# Altium PCB RS-119-8912.PcbDoc (part 2 of 2)
Units mm, origin at the board's own origin, x right, y up, seen from the top; angles counter-clockwise.
Board outline 125 x 120.8 mm, 2 copper layers (Top Layer, Bottom Layer); 161 components, 141 nets, 539 pads, 141 vias.
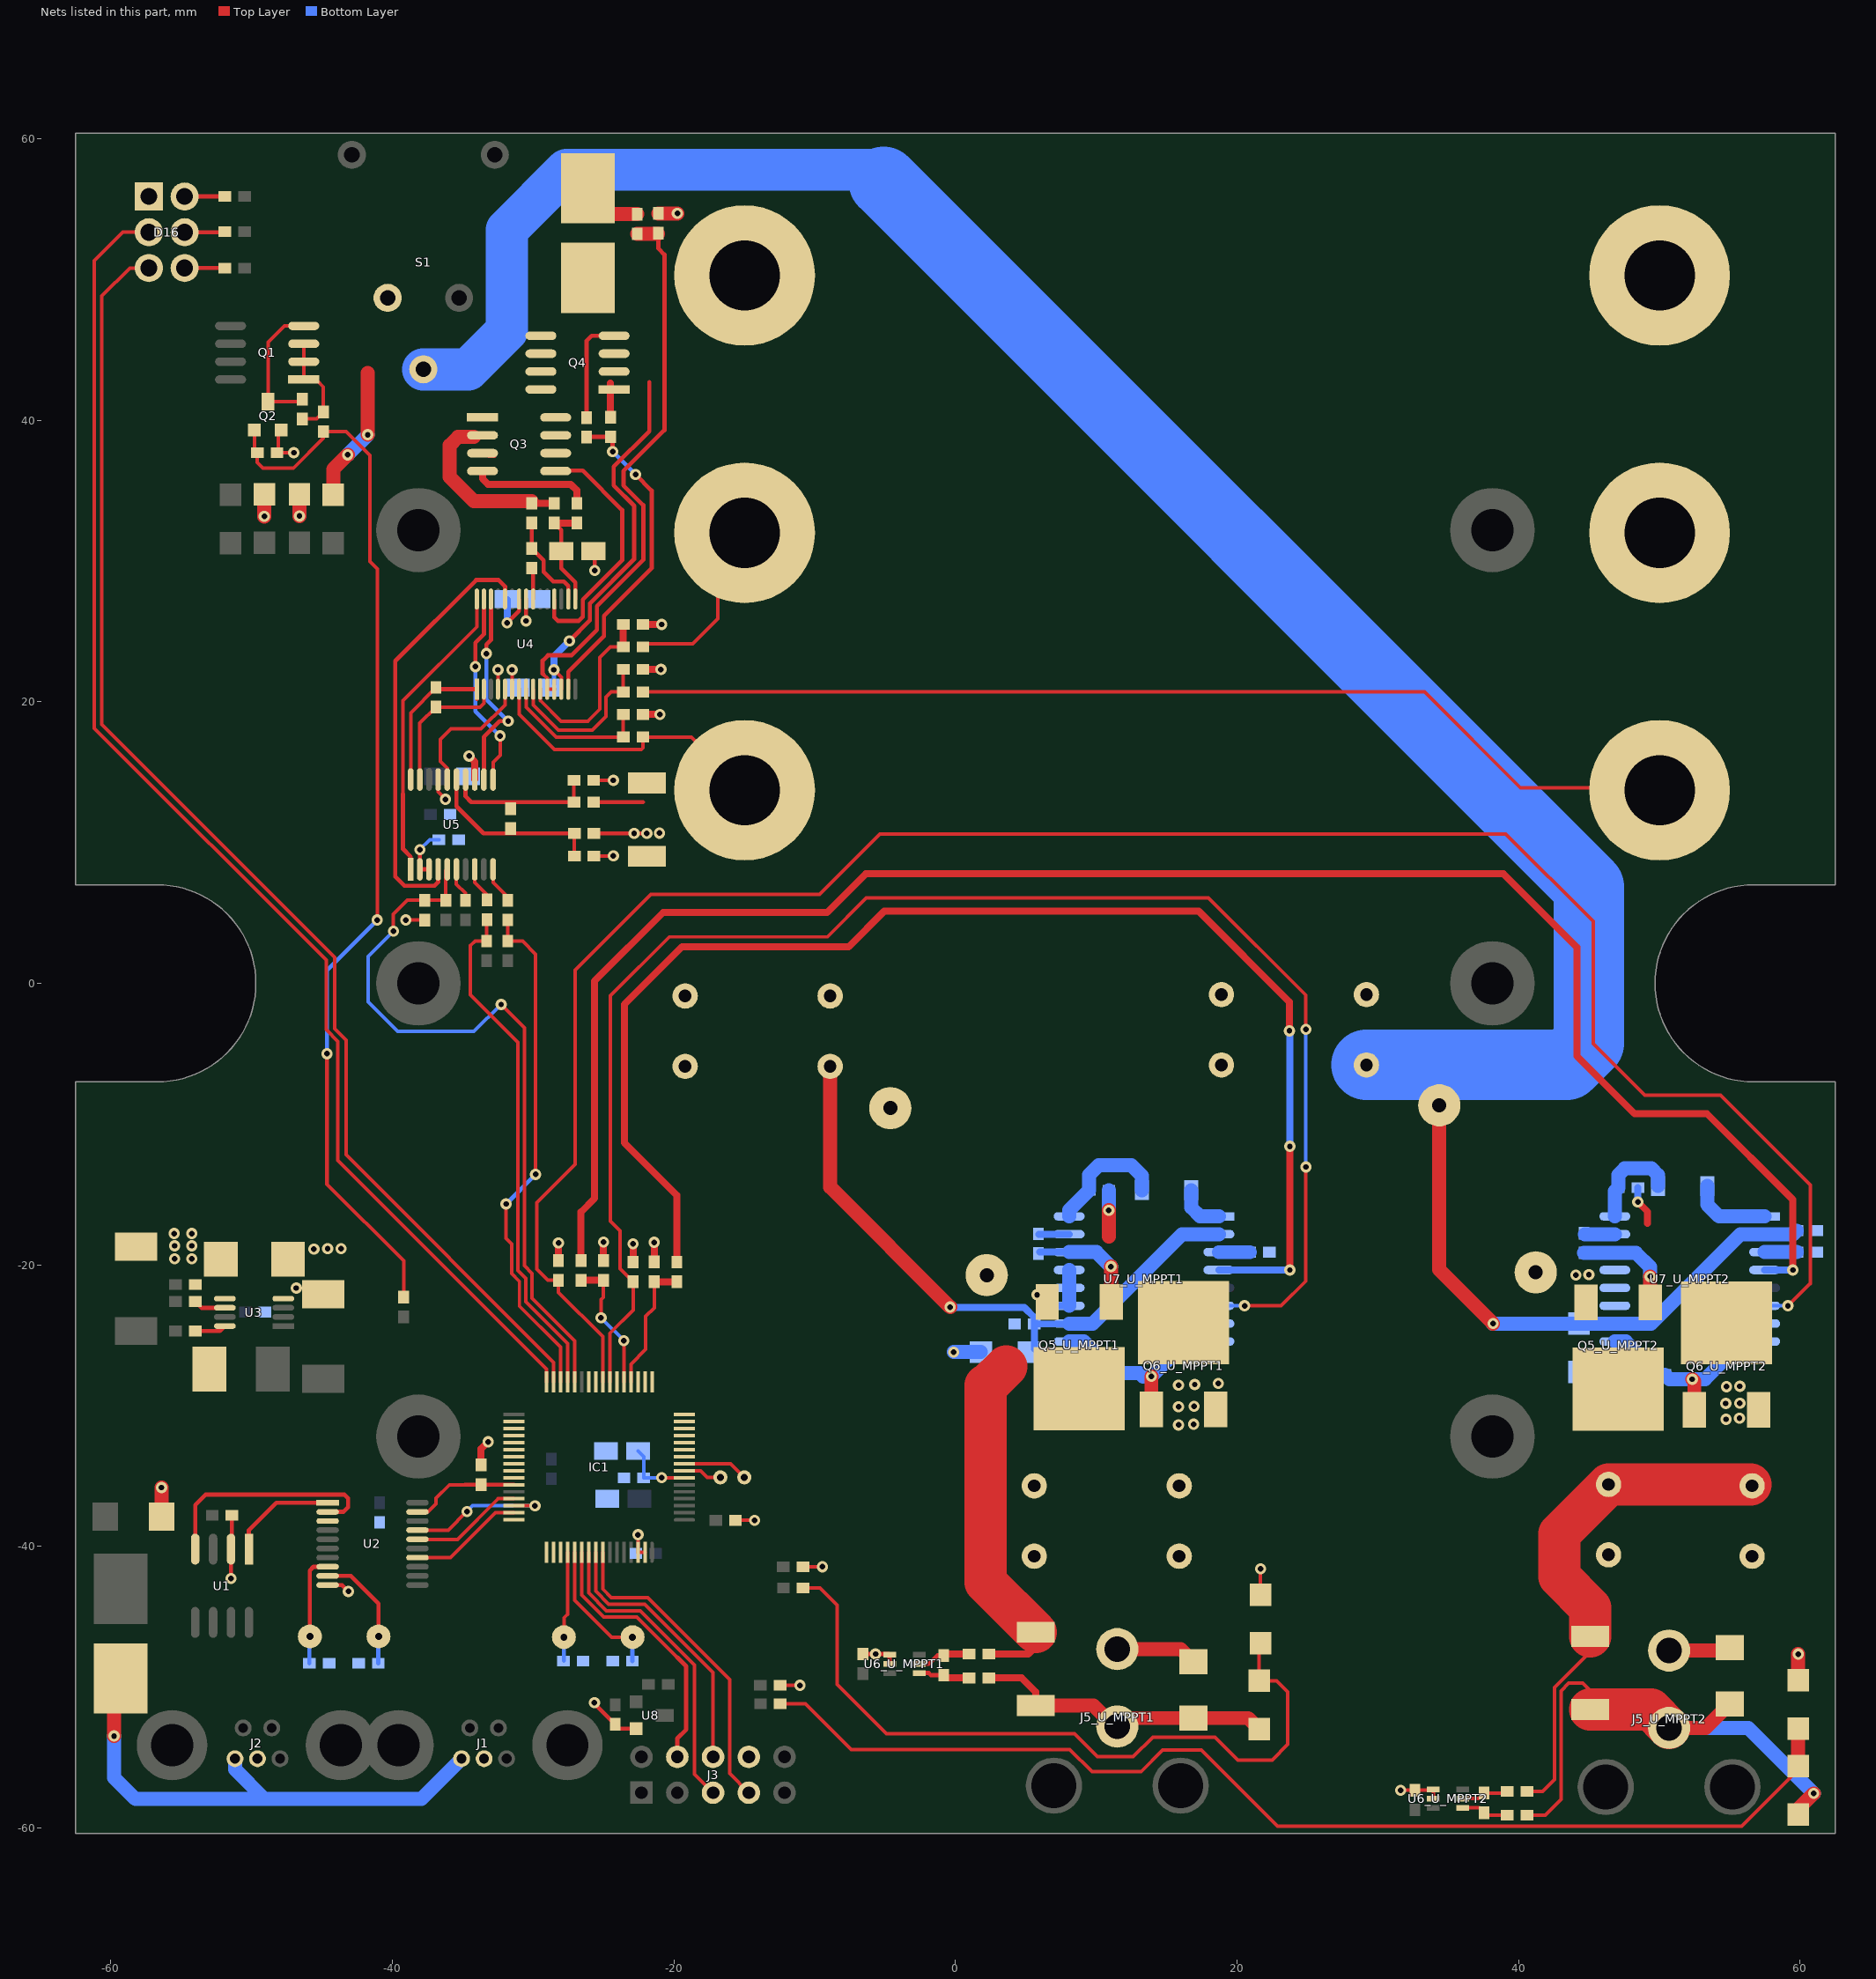
[diagram p2: the nets of this part, all layers, seen from the top]

## Via types
v1: diameter 0.8, hole 0.4, Top Layer to Bottom Layer, 141 vias

## Nets (pads, with @x,y where several pads share a name; then routed paths per layer and width w, separated by ;. In a path a pad name is that pad's centre, name@x,y a point inside that pad or via, vN(x,y) a via of type N, cw(c..) or ccw(c..) an arc to the next point about the centre after c; other vN are vias at no path point) (continued)
CANGND: C1.1 C2.2 C3.1 C4.1 C5.2 C6.2 C8.2 C9.2 C11.2 C12.2 C13.2 C14.2 C15.2 C16.2 C17.2 C18.2 C19.2 C20.2 C21.2 C22.2 C23.2 C24.2 C25.2 C26.2 C28.2 C30.2 C32_U_MPPT1.1 C32_U_MPPT2.1 C34_U_MPPT1.1 C34_U_MPPT2.1 C35_U_MPPT1.2 C35_U_MPPT2.2 C36_U_MPPT1.2 C36_U_MPPT2.2 C37_U_MPPT1.2 C37_U_MPPT2.2 C38_U_MPPT1.2 C38_U_MPPT2.2 C39_U_MPPT1.2 C39_U_MPPT2.2 C40_U_MPPT1.2 C40_U_MPPT2.2 C41_U_MPPT1.2 C41_U_MPPT2.2 D1.A D2.A D4_U_MPPT1.A D4_U_MPPT2.A D16.1 IC1.62 IC1.63 J1.3 J2.3 J3.8 J5_U_MPPT1.2 J5_U_MPPT2.2 Q2.2 Q6_U_MPPT1.3 Q6_U_MPPT2.3 R10.2 R11.1 R14.2 R15.2 R21.1 R34.1 R36.2 R37.2 R44_U_MPPT1.1 R44_U_MPPT2.1 R47_U_MPPT1.2 R47_U_MPPT2.2 R48_U_MPPT1.2 R48_U_MPPT2.2 U1.2 U2.10 U3.4 U4.4 U4.6 U4.23 U5.13 U5.17 U6_U_MPPT1.1 U6_U_MPPT1.2 U6_U_MPPT2.1 U6_U_MPPT2.2 U7_U_MPPT1.7 U7_U_MPPT2.7 U8.2 | length 73.4
  Top Layer w0.25: R11.1@-48.2,37.7 v1(-47,37.7) ; R11.1@-48.1,37.925 Q2.2@-48.1,39.095 ; v1(-39.05,4.5) R34.1@-37.7,4.5 ; U5.17@-36.75,14.48 -36.75,13.596 v1(-36.225,13.071) ; U4.4@-32.5,20.9 v1(-32.5,22.275) ; U4.6@-31.5,20.9 v1(-31.5,22.275) ; C28.2@-25.703,14.425 v1@-24.475,14.425 ; C30.2@-25.678,9.05 v1(-24.3,9.05) ; v1(-22.55,-39.175) IC1.62@-22.558,-40.42 IC1.63@-22.058,-40.42 ; C12.2@-15.628,-38.15 v1(-14.275,-38.15) ; C39_U_MPPT2.2@-12.453,-49.875 v1(-11.05,-49.875) ; C39_U_MPPT1.2@-10.828,-41.45 v1(-9.45,-41.45) ; R48_U_MPPT1.2@21.675,-43.446 v1(21.675,-41.6) ; v1(31.625,-57.325) U6_U_MPPT2.1@33.9,-57.325 ; U6_U_MPPT2.2@33.95,-57.925 U6_U_MPPT2.1@33.95,-57.275
  Top Layer w0.3: v1(-51.465,-42.285) U1.2@-51.465,-40.2 ; U1.2@-51.4,-40.135 C1.1@-51.4,-37.8 ; U2.10@-44.6,-42.75 -43.575,-42.75 v1(-43.125,-43.2) ; v1(-30.5,25.75) U4.23@-30.5,27.3 ; R37.2@-25.678,10.65 v1(-21.925,10.65) ; v1(-25.647,-51.103) -25.647,-51.175 -23.867,-52.955 U8.2@-22.675,-52.955 ; v1(-25.625,29.325) C18.2@-25.625,30.5 ; C32_U_MPPT1.1@-6.575,-47.65 U6_U_MPPT1.1@-4.725,-47.65 ; U6_U_MPPT1.2@-4.675,-48.35 U6_U_MPPT1.1@-4.675,-47.7
  Top Layer w0.5: v1(-34.55,16.15) -34.15,15.75 U5.13@-34.15,14.48 ; R10.2@-33.7,-34.223 -33.7,-33.075 v1(-33.2,-32.575) ; R47_U_MPPT2.2@-28.2,-19.703 v1(-28.2,-18.45) ; R44_U_MPPT2.1@-25,-19.7 v1(-25,-18.375) ; R47_U_MPPT1.2@-22.9,-19.803 v1(-22.9,-18.5) ; C26.2@-22.203,19.1 v1(-21,19.1) ; C25.2@-22.203,22.3 v1(-20.925,22.3) ; C24.2@-22.203,25.5 v1(-20.875,25.5) ; R44_U_MPPT1.1@-21.4,-19.8 v1(-21.4,-18.4)
  Top Layer w1: D1.A@-56.4,-37.9 v1(-56.4,-35.825) ; v1(-49.1,33.175) R14.2@-49.1,34.729 ; v1(-46.6,33.2) R15.2@-46.6,34.729 ; C23.2@-21.1,54.697 v1(-19.753,54.697) ; J5_U_MPPT1.2@11.5,-47.3 16,-47.3 D4_U_MPPT1.A@16.9,-48.2 ; J5_U_MPPT2.2@50.7,-47.4 D4_U_MPPT2.A@55.1,-47.4 ; R48_U_MPPT2.2@59.873,-49.521 v1(59.873,-47.652)
  Bottom Layer w1: v1(-0.125,-26.2) C34_U_MPPT1.1@1.8,-26.2
  other v1: -5.675,-47.65 15.85,-31.375 16.925,-31.325 54.75,-30.975 55.7,-30.9 15.85,-30.075 16.95,-30.05 54.725,-29.85 55.725,-29.825 54.775,-28.65 55.725,-28.625 15.85,-28.55 17,-28.5 18.675,-28.425 -46.825,-21.65 -55.475,-19.575 -54.25,-19.575 -45.575,-18.875 -44.6,-18.85 -43.65,-18.85 -55.475,-18.65 -54.25,-18.65 -55.5,-17.775 -54.25,-17.775 -22.825,10.65 -21.025,10.675 -24.3,14.425
EREF+: IC1.10
EREF-: IC1.11
LEDRED: D16.3 IC1.31 | length 94.6
  Top Layer w0.25: D16.3@-57.3,50.82 -58.655,50.82 -60.65,48.825 -60.65,18.4 -44.1,1.85 -44.1,-3.225 -43.3,-4.025 -43.3,-12.183 -28.558,-26.925 IC1.31@-28.558,-28.32
LEDYLW: D16.2 IC1.32 | length 97.7
  Top Layer w0.25: D16.2@-57.3,53.36 -59.14,53.36 -61.175,51.325 -61.175,18.125 -44.7,1.65 -44.7,-3.297 -43.875,-4.122 -43.875,-12.575 -29.058,-27.392 IC1.32@-29.058,-28.32
NetB1_1: B1.1 F2.1 R23.2 | length 2.8
  Top Layer w1: F2.1@-25.422,54.647 R23.2@-22.6,54.647
NetB1_2: B1.2 B2.1 R25.2 | length 7.9
  Top Layer w0.25: R25.2@-22.2,24.125 -18.65,24.125 -16.875,25.9 B2.1@-16.875,27.7
NetB2_2: B2.2 B3.1 R27.2 | length 75.2
  Top Layer w0.25: R27.2@-22.203,20.7 33.325,20.7 40.15,13.875 B3.1@50.15,13.875
NetB3_2: B3.2 R28.2 R35.2 R36.1 U4.7 | length 24.8
  Top Layer w0.25: U4.7@-31,20.9 -31,19.1 -28.5,16.6 -22.325,16.6 -22.203,16.722 R28.2@-22.203,17.5 -18.758,17.5 B3.2@-14.974,13.716
  Top Layer w0.3: R35.2@-25.703,12.875 -22.2,12.875
NetC3_2: C3.2 U2.8 Y1.2 | length 7.9
  Top Layer w0.3: Y1.2@-45.865,-46.4 -45.865,-41.715 -45.6,-41.45 U2.8@-44.6,-41.45
  Bottom Layer w0.3: C3.2@-45.897,-48.3 Y1.2@-45.897,-46.432
NetC4_2: C4.2 U2.9 Y1.1 | length 8.8
  Top Layer w0.3: U2.9@-44.6,-42.1 -42.95,-42.1 -40.985,-44.065 Y1.1@-40.985,-46.4
  Bottom Layer w0.3: C4.2@-41.003,-48.3 Y1.1@-41.003,-46.247
NetC7_2: C7.2 R3.2 U3.6 | length 2.3
  Top Layer w0.3: C7.2@-54.003,-22.6 -53.553,-23.05 U3.6@-51.9,-23.05
NetC18_1: C18.1 R17.1 R18.1 U4.16 | length 7.6
  Top Layer w0.3: R17.1@-28.5,32.7 -28,32.2 -28,29.475 -27,28.475 U4.16@-27,27.3
  Top Layer w0.5: R17.1@-28.5,32.7 R18.1@-26.9,32.7
NetC20_1: C20.1 U4.24 | length 3.7
  Top Layer w0.3: v1(-31.85,25.6) -31,26.45 U4.24@-31,27.3
  Bottom Layer w0.5: v1(-31.85,25.6) C20.1@-31.85,27.25
NetC21_1: C21.1 F2.2 Q4.1 Q4.2 Q4.3 R20.2 U4.13 | length 29.5
  Top Layer w0.25: v1(-28.525,22.275) -28,21.75 U4.13@-28,20.9
  Top Layer w0.3: v1(-27.425,24.325) -25.964,25.786 -25.964,26.993 -25.917,27.04 -22.825,30.132 -22.825,33.915 -24.275,35.365 -24.275,36.7 -21.75,39.225 -21.75,42.725
  Top Layer w0.5: R20.2@-24.5,40.222 -24.5,42.65
  Bottom Layer w0.3: C21.1@-28.525,21.275 v1(-28.525,22.275)
  Bottom Layer w0.5: v1(-28.525,22.275) -28.525,23.225 v1(-27.425,24.325)
NetC23_1: C23.1 R23.1 U4.11 U4.12 | length 40.4
  Top Layer w0.25: -29.268,21.943 -29,21.675 ; U4.11@-29,20.9 U4.12@-28.5,20.9
  Top Layer w0.3: -29.268,21.943 -29.325,22 -29.325,22.925 -28.95,23.3 -27.275,23.3 -25.464,25.111 -25.464,26.786 -22.175,30.075 -22.175,33.972 -23.578,35.375 -23.578,36.397 -20.675,39.3 -20.675,51.775 -21.1,52.2 C23.1@-21.1,53.3 ; U4.11@-29,20.9 -29,21.675
  Top Layer w1: R23.1@-22.6,53.25 C23.1@-21.15,53.25
NetC24_1: C24.1 R25.1 U4.10 | length 13.2
  Top Layer w0.25: U4.10@-29.5,20.9 -29.5,20.1 -28.025,18.625 -26.125,18.625 -25.275,19.475 -25.275,23.15 -24.525,23.9 R25.1@-23.6,23.9
  Top Layer w0.5: R25.1@-23.6,23.9 C24.1@-23.6,25.5
NetC25_1: C25.1 R27.1 U4.9 | length 11.8
  Top Layer w0.25: U4.9@-30,20.9 -30,19.761 -28.214,17.975 -25.8,17.975 -24.825,18.95 -24.825,20.325 -24.45,20.7 R27.1@-23.6,20.7 C25.1@-23.6,22.3
NetC26_1: C26.1 R28.1 U4.8 | length 10.7
  Top Layer w0.25: U4.8@-30.5,20.9 -30.5,19.625 -28.375,17.5 R28.1@-23.6,17.5 C26.1@-23.6,19.1
NetC27_1: C27.1 U4.2 U5.19 | length 10.1
  Top Layer w0.25: U5.19@-38.05,14.48 -38.05,18.475 C27.1@-36.9,19.625 -33.761,19.625 -33.5,19.886 U4.2@-33.5,20.9
NetC27_2: C27.2 U4.1 U5.20 | length 10.8
  Top Layer w0.25: U5.20@-38.7,14.48 -38.7,19.222 C27.2@-36.9,21.022 ; U4.1@-34,20.175 U4.1@-34,20.9
  Top Layer w0.3: C27.2@-36.778,20.9 U4.1@-34,20.9
NetC28_1: C28.1 C29.1 R35.1 U5.14 | length 10.6
  Top Layer w0.25: R35.1@-27.1,12.875 C28.1@-27.1,14.425
  Top Layer w0.3: U5.14@-34.8,14.48 -34.8,13.275 -34.4,12.875 R35.1@-27.1,12.875
NetC29_2: C29.2 C30.1 R37.1 U5.15 | length 12.7
  Top Layer w0.25: C30.1@-27.075,9.05 R37.1@-27.075,10.65
  Top Layer w0.3: U5.15@-35.45,14.48 -35.45,12.575 -33.525,10.65 R37.1@-27.075,10.65
NetC31_U_MPPT1_1: C31_U_MPPT1.1 R38_U_MPPT1.2 U6_U_MPPT1.5 | length 3.8
  Top Layer w0.3: U6_U_MPPT1.5@-2.575,-48.35 -1.875,-48.35 -1.275,-47.75 C31_U_MPPT1.1@-0.825,-47.75
  Top Layer w0.5: C31_U_MPPT1.1@-0.825,-47.75 -0.725,-47.65 R38_U_MPPT1.2@0.978,-47.65
NetC31_U_MPPT1_2: C31_U_MPPT1.2 R39_U_MPPT1.2 U6_U_MPPT1.4 | length 3.7
  Top Layer w0.3: U6_U_MPPT1.4@-2.575,-49 -1.9,-49 -1.753,-49.147 C31_U_MPPT1.2@-0.825,-49.147
  Top Layer w0.5: C31_U_MPPT1.2@-0.825,-49.147 -0.622,-49.35 R39_U_MPPT1.2@0.978,-49.35
NetC31_U_MPPT2_1: C31_U_MPPT2.1 R38_U_MPPT2.2 U6_U_MPPT2.5 | length 3.4
  Top Layer w0.25: U6_U_MPPT2.5@36.05,-57.925 37.15,-57.925 C31_U_MPPT2.1@37.55,-57.525 39.078,-57.525 R38_U_MPPT2.2@39.203,-57.4
NetC31_U_MPPT2_2: C31_U_MPPT2.2 R39_U_MPPT2.2 U6_U_MPPT2.4 | length 3.4
  Top Layer w0.25: U6_U_MPPT2.4@36.05,-58.575 37.203,-58.575 37.728,-59.1 R39_U_MPPT2.2@39.203,-59.1
NetC33_U_MPPT1_1: C33_U_MPPT1.1 D3_U_MPPT1.K U7_U_MPPT1.16 | length 8.9
  Bottom Layer w1: U7_U_MPPT1.16@8.08,-16.555 8.08,-16.12 C33_U_MPPT1.1@9.5,-14.7 9.5,-13.6 10.175,-12.925 12.5,-12.925 13.25,-13.675 D3_U_MPPT1.K@13.25,-14.7
NetC33_U_MPPT1_2: C33_U_MPPT1.2 L2_U_MPPT1.1 Q5_U_MPPT1.3 Q6_U_MPPT1.2 U7_U_MPPT1.11 U7_U_MPPT1.12 U7_U_MPPT1.13 | length 8.4
  Top Layer w1: 10.897,-18.003 v1(10.897,-16.122)
  Bottom Layer w0.5: v1(5.8,-22.125) 6.58,-22.905 U7_U_MPPT1.11@8.08,-22.905
  Bottom Layer w1: U7_U_MPPT1.11@8.08,-22.905 U7_U_MPPT1.13@8.08,-20.365 ; v1(10.897,-16.122) C33_U_MPPT1.2@10.897,-14.7
NetC33_U_MPPT2_1: C33_U_MPPT2.1 D3_U_MPPT2.K U7_U_MPPT2.16 | length 7
  Bottom Layer w1: U7_U_MPPT2.16@46.847,-16.556 46.847,-14.761 C33_U_MPPT2.1@47.084,-14.524 47.084,-13.616 47.55,-13.15 49.45,-13.15 49.909,-13.609 D3_U_MPPT2.K@49.909,-14.397
NetC33_U_MPPT2_2: C33_U_MPPT2.2 L2_U_MPPT2.1 Q5_U_MPPT2.3 Q6_U_MPPT2.2 U7_U_MPPT2.11 U7_U_MPPT2.12 U7_U_MPPT2.13 | length 2.8
  Top Layer w0.5: v1(48.481,-15.531) 49.175,-16.225 49.175,-17.05
  Bottom Layer w0.5: v1(48.481,-15.531) C33_U_MPPT2.2@48.481,-14.524
  other v1: 44.075,-20.725 45,-20.7
NetC35_U_MPPT1_1: C35_U_MPPT1.1 C40_U_MPPT1.1 Q5_U_MPPT1.2 R38_U_MPPT1.1 R40_U_MPPT1.2 | length 25.6
  Top Layer w0.5: R38_U_MPPT1.1@2.375,-47.65 5.175,-47.65 5.7,-47.125 R40_U_MPPT1.2@5.7,-46.1
  Top Layer w3: 3.6,-27.225 2.25,-28.575 2.15,-28.575 2.15,-42.55 R40_U_MPPT1.2@5.7,-46.1
NetC35_U_MPPT2_1: C35_U_MPPT2.1 C40_U_MPPT2.1 Q5_U_MPPT2.2 R38_U_MPPT2.1 R40_U_MPPT2.2 | length 36.8
  Top Layer w0.25: R38_U_MPPT2.1@40.6,-57.4 41.725,-57.4 42.575,-56.55 42.575,-50.025 45.1,-47.5 R40_U_MPPT2.2@45.1,-46.4
  Top Layer w3: R40_U_MPPT2.2@45.1,-46.4 45.1,-44.35 42.9,-42.15 42.9,-39.1 C35_U_MPPT2.1@46.4,-35.6 C40_U_MPPT2.1@56.5,-35.6
NetC38_U_MPPT1_1: C38_U_MPPT1.1 U7_U_MPPT1.3 | length 2.2
  Bottom Layer w1: U7_U_MPPT1.3@18.725,-19.1 C38_U_MPPT1.1@20.9,-19.1
NetC38_U_MPPT2_1: C38_U_MPPT2.1 U7_U_MPPT2.3 | length 2.3
  Bottom Layer w1: U7_U_MPPT2.3@57.487,-19.096 C38_U_MPPT2.1@59.784,-19.096
NetD2_K: D2.K L1.1 U3.5
NetD3_U_MPPT1_A: D3_U_MPPT1.A U7_U_MPPT1.1 | length 3.5
  Bottom Layer w1: D3_U_MPPT1.A@16.75,-14.7 16.75,-15.925 17.38,-16.555 U7_U_MPPT1.1@18.72,-16.555
NetD3_U_MPPT2_A: D3_U_MPPT2.A U7_U_MPPT2.1 | length 5.7
  Bottom Layer w1: D3_U_MPPT2.A@53.409,-14.397 53.409,-15.709 54.256,-16.556 U7_U_MPPT2.1@57.487,-16.556
NetD4_U_MPPT1_K: D4_U_MPPT1.K J5_U_MPPT1.1 R39_U_MPPT1.1 R40_U_MPPT1.1 R42_U_MPPT1.1 | length 21.6
  Top Layer w0.5: R39_U_MPPT1.1@2.375,-49.35 4.7,-49.35 5.7,-50.35 R40_U_MPPT1.1@5.7,-51.3
  Top Layer w1: R40_U_MPPT1.1@5.7,-51.3 9.8,-51.3 J5_U_MPPT1.1@11.3,-52.8 ; J5_U_MPPT1.1@11.5,-52.8 12.1,-52.2 D4_U_MPPT1.K@16.9,-52.2 20.8,-52.2 R42_U_MPPT1.1@21.575,-52.975
NetD4_U_MPPT2_K: D4_U_MPPT2.K J5_U_MPPT2.1 R39_U_MPPT2.1 R40_U_MPPT2.1 R42_U_MPPT2.1 | length 39.8
  Top Layer w0.25: R39_U_MPPT2.1@40.6,-59.1 41.9,-59.1 43.025,-57.975 43.025,-50.275 43.575,-49.725 44.575,-49.725 45.1,-50.25 R40_U_MPPT2.1@45.1,-51.6
  Top Layer w1: J5_U_MPPT2.1@50.7,-52.9 53.3,-52.9 D4_U_MPPT2.K@55,-51.2 ; R42_U_MPPT2.1@59.873,-59.046 59.873,-58.652 v1(60.975,-57.55)
  Top Layer w3: R40_U_MPPT2.1@45.1,-51.6 49.4,-51.6 J5_U_MPPT2.1@50.7,-52.9
  Bottom Layer w1: J5_U_MPPT2.1@50.7,-52.9 56.325,-52.9 v1(60.975,-57.55)
NetD16_4: D16.4 R29.2 | length 2.8
  Top Layer w0.3: D16.4@-54.76,50.82 R29.2@-51.917,50.82
NetD16_5: D16.5 R30.2 | length 2.8
  Top Layer w0.3: D16.5@-54.76,53.36 R30.2@-51.937,53.36
NetD16_6: D16.6 R31.2 | length 2.9
  Top Layer w0.3: D16.6@-54.76,55.9 R31.2@-51.897,55.9
NetF1_1: F1.1 J1.2 J2.2 | length 37
  Top Layer w1: v1(-59.775,-53.475) F1.1@-59.775,-49.675
  Bottom Layer w1: v1(-59.775,-53.475) -59.775,-56.425 -58.25,-57.95 -37.95,-57.95 J1.2@-35.084,-55.084 ; J2.2@-51.184,-55.084 -51.184,-55.841 -49.075,-57.95
NetQ1_4: Q1.4 Q2.3 R8.1 | length 9.7
  Top Layer w0.25: R8.1@-46.4,41.5 -46.568,41.332 Q2.3@-48.835,41.332 -48.835,45.54 -47.67,46.705 Q1.4@-46.3,46.705
NetQ2_1: Q2.1 R7.1 R9.2 R11.2 | length 76.1
  Top Layer w0.25: R11.2@-49.8,37.903 Q2.1@-49.8,39.3 ; R11.2@-49.597,37.7 -49.597,36.997 -49.2,36.6 -47.025,36.6 -44.9,38.725 R7.1@-44.9,39.2 -43.3,39.2 -41.6,37.5 -41.6,29.975 -41.075,29.45 v1(-41.075,4.5) ; -44.65,-14.275 -39.2,-19.725 R9.2@-39.2,-22.303
  Top Layer w0.3: -44.65,-14.275 v1(-44.65,-5)
  Bottom Layer w0.3: v1(-44.65,-5) -44.65,0.925 v1(-41.075,4.5)
NetQ3_1: Q3.1 Q3.2 Q3.3 R16.2 R17.2 S1.1 | length 12.7
  Top Layer w0.3: Q3.3@-33.15,37.475 Q3.3@-32.75,37.475
  Top Layer w0.5: R16.2@-30.1,34.097 R17.2@-28.5,34.097
  Top Layer w1: Q3.2@-34.225,38.825 -35.325,38.825 -35.925,38.225 -35.925,35.975 -34.2,34.25 R16.2@-30.1,34.25
NetQ3_4: Q3.4 R18.2 | length 8.5
  Top Layer w0.5: Q3.4@-33.6,36.395 -33.6,35.85 -33.2,35.45 -27.325,35.45 -26.9,35.025 R18.2@-26.9,34.097
NetQ3_5: Q3.5 Q3.6 Q3.7 Q3.8 Q4.5 Q4.6 Q4.7 Q4.8 U4.19 | length 17.6
  Top Layer w0.3: U4.19@-28.5,27.3 -28.5,26 -28.25,25.75 -26.75,25.75 -26.464,26.036 -26.464,27.261 -23.675,30.05 -23.675,33.625 -26.475,36.425 Q3.5@-27.8,36.425
NetQ4_4: Q4.4 R19.2 | length 7.6
  Top Layer w0.3: R19.2@-26.2,40.197 -26.2,45.65 -25.845,46.005 Q4.4@-24.25,46.005
NetQ5_U_MPPT1_1: Q5_U_MPPT1.1 R41_U_MPPT1.2 U7_U_MPPT1.14 | length 7.9
  Top Layer w1: Q5_U_MPPT1.1@11.05,-22.6 v1(11.05,-20.125)
  Bottom Layer w0.5: R41_U_MPPT1.2@6.002,-19.095 U7_U_MPPT1.14@8.08,-19.095
  Bottom Layer w1: U7_U_MPPT1.14@8.08,-19.095 10.02,-19.095 v1(11.05,-20.125)
NetQ5_U_MPPT2_1: Q5_U_MPPT2.1 R41_U_MPPT2.2 U7_U_MPPT2.14 | length 7.6
  Top Layer w1: Q5_U_MPPT2.1@49.355,-22.655 v1(49.355,-20.83)
  Bottom Layer w1: R41_U_MPPT2.2@44.65,-19.147 48.347,-19.147 49.355,-20.155 v1(49.355,-20.83)
NetQ6_U_MPPT1_1: Q6_U_MPPT1.1 R45_U_MPPT1.2 U7_U_MPPT1.8 | length 10.2
  Top Layer w1: Q6_U_MPPT1.1@13.92,-30.27 13.92,-27.93 v1(13.925,-27.925)
  Bottom Layer w1: R45_U_MPPT1.2@11.997,-27.7 13.1,-27.7 13.325,-27.925 v1(13.925,-27.925) 16.405,-25.445 U7_U_MPPT1.8@18.72,-25.445
NetQ6_U_MPPT2_1: Q6_U_MPPT2.1 R45_U_MPPT2.2 U7_U_MPPT2.8 | length 10.6
  Top Layer w1: v1(52.35,-28.125) 52.495,-28.27 Q6_U_MPPT2.1@52.495,-30.295
  Bottom Layer w1: R45_U_MPPT2.2@50.397,-27.8 50.722,-28.125 53.25,-28.125 55.929,-25.446 U7_U_MPPT2.8@57.487,-25.446
NetR2_1: R2.1 U3.8 | length 2.2
  Top Layer w0.3: R2.1@-54,-24.7 -52.25,-24.7 U3.8@-51.9,-24.35
NetR16_1: R16.1 R22.1 U4.17 | length 6.9
  Top Layer w0.3: R16.1@-30.1,32.7 R22.1@-30.1,30.9 -29.25,30.05 -29.25,29.225 -28.575,28.55 -27.825,28.55 -27.5,28.225 U4.17@-27.5,27.3
NetR19_1: R19.1 R20.1 U4.14 | length 23.3
  Top Layer w0.3: U4.14@-27.5,20.9 -27.5,22.125 -26.895,22.73 -24.964,24.661 -24.964,26.111 -21.575,29.5 -21.575,35 v1(-22.725,36.15) ; R19.1@-26.2,38.8 -26.175,38.825 R20.1@-24.5,38.825 -24.35,38.675 v1(-24.35,37.775)
  Bottom Layer w0.3: v1(-24.35,37.775) v1(-22.725,36.15)
NetR21_2: R21.2 U5.2 U5.3 | length 3.7
  Top Layer w0.3: v1(-38.05,9.5) U5.2@-38.05,8.1 U5.3@-37.4,8.1
  Bottom Layer w0.25: v1(-38.05,9.5) -37.35,10.2 R21.2@-36.697,10.2
NetR22_2: R22.2 U4.22 | length 2.2
  Top Layer w0.3: R22.2@-30.1,29.503 -30,29.403 U4.22@-30,27.3
NetR24_1: R24.1 U5.8 | length 2.5
  Top Layer w0.25: U5.8@-34.15,8.1 -34.15,7.15 -33.275,6.275 R24.1@-33.275,5.925
NetR26_1: R26.1 U5.10 | length 2.6
  Top Layer w0.25: U5.10@-32.85,8.1 -32.85,7.175 -31.8,6.125 R26.1@-31.8,5.9
NetR32_1: R32.1 U5.6 | length 2.5
  Top Layer w0.25: U5.6@-35.45,8.1 -35.45,7.05 -34.8,6.4 R32.1@-34.8,5.9
NetR41_U_MPPT1_1: R41_U_MPPT1.1 U7_U_MPPT1.15 | length 2.2
  Bottom Layer w0.5: R41_U_MPPT1.1@5.925,-17.825 U7_U_MPPT1.15@8.08,-17.825
NetR41_U_MPPT2_1: R41_U_MPPT2.1 U7_U_MPPT2.15 | length 2.1
  Bottom Layer w1: R41_U_MPPT2.1@44.726,-17.826 U7_U_MPPT2.15@46.847,-17.826
NetR42_U_MPPT1_2: R42_U_MPPT1.2 R46_U_MPPT1.1 R48_U_MPPT1.1 | length 53.1
  Top Layer w0.25: R46_U_MPPT1.1@-10.825,-42.95 -9.625,-42.95 -8.413,-44.162 -8.413,-49.812 -4.9,-53.325 8.45,-53.325 10.075,-54.95 12.625,-54.95 14.025,-53.55 18.45,-53.55 20.075,-55.175 22.5,-55.175 23.6,-54.075 23.6,-50.325 22.821,-49.546 R42_U_MPPT1.2@21.575,-49.546 R48_U_MPPT1.1@21.575,-46.975
NetR42_U_MPPT2_2: R42_U_MPPT2.2 R46_U_MPPT2.1 R48_U_MPPT2.1 | length 81.8
  Top Layer w0.25: R46_U_MPPT2.1@-12.45,-51.175 -10.65,-51.175 -7.4,-54.425 8.125,-54.425 9.7,-56 13.2,-56 14.725,-54.475 17.475,-54.475 22.875,-59.875 55.85,-59.875 R42_U_MPPT2.2@60.05,-55.675
  Top Layer w1: R42_U_MPPT2.2@59.873,-55.617 R48_U_MPPT2.1@59.873,-52.95
NetR43_U_MPPT1_2: R43_U_MPPT1.2 U7_U_MPPT1.4 | length 96.6
  Top Layer w0.5: R43_U_MPPT1.2@-19.8,-19.803 -19.8,-15.05 -23.525,-11.325 -23.525,-1.5 -19.425,2.6 -7.575,2.6 -5.05,5.125 17.275,5.125 23.725,-1.325 v1(23.725,-3.375) ; v1(23.76,-20.365) v1(23.76,-11.585)
  Bottom Layer w0.5: U7_U_MPPT1.4@18.72,-20.365 v1(23.76,-20.365) ; v1(23.725,-3.375) 23.76,-3.41 v1(23.76,-11.585)
NetR43_U_MPPT2_2: R43_U_MPPT2.2 U7_U_MPPT2.4 | length 129.7
  Top Layer w0.5: R43_U_MPPT2.2@-26.6,-19.703 -26.6,-16.25 -25.632,-15.282 -25.632,0.168 -20.775,5.025 -9.125,5.025 -6.375,7.775 38.925,7.775 44.15,2.55 44.15,-5.175 48.25,-9.275 53.4,-9.275 59.491,-15.366 v1(59.491,-20.366)
  Bottom Layer w0.5: U7_U_MPPT2.4@57.487,-20.366 v1(59.491,-20.366)
NetR45_U_MPPT1_1: R45_U_MPPT1.1 U7_U_MPPT1.9 | length 3.9
  Bottom Layer w1: U7_U_MPPT1.9@8.08,-25.445 9.12,-25.445 10.6,-26.925 R45_U_MPPT1.1@10.6,-27.7
NetR45_U_MPPT2_1: R45_U_MPPT2.1 U7_U_MPPT2.9 | length 3.7
  Bottom Layer w1: U7_U_MPPT2.9@46.847,-25.446 47.621,-25.446 49,-26.825 R45_U_MPPT2.1@49,-27.8
NetU1_1: U1.1 U2.1 | length 7.8
  Top Layer w0.3: U1.1@-50.195,-40.2 -50.195,-38.845 -48.25,-36.9 U2.1@-44.6,-36.9
NetU1_4: U1.4 U2.2 | length 16.6
  Top Layer w0.3: U1.4@-54.005,-40.2 -54.005,-37.055 -53.275,-36.325 -43.4,-36.325 -43.15,-36.575 -43.15,-37.225 -43.475,-37.55 U2.2@-44.6,-37.55
NetU2_3: U2.3
NetU4_5: U4.5 U5.16 | length 9.8
  Top Layer w0.25: U5.16@-36.1,14.48 -36.1,15.275 -36.6,15.775 -36.6,17.325 -35.85,18.075 -33.7,18.075 -32,19.775 U4.5@-32,20.9
NetU4_26: U4.26 U5.4 | length 30.9
  Top Layer w0.3: U5.4@-36.75,8.1 -36.75,7.175 -37,6.925 -39.15,6.925 -39.8,7.575 -39.8,22.9 -34.05,28.65 -32.45,28.65 -32,28.2 U4.26@-32,27.3
NetU4_28: U4.28 U5.12 | length 14.7
  Top Layer w0.3: U5.12@-33.5,14.48 -33.5,17.5 -32.375,18.625 v1(-31.775,18.625) ; v1(-33.325,23.425) -33.325,24.075 -33,24.4 U4.28@-33,27.3
  Bottom Layer w0.3: v1(-33.325,23.425) -33.325,20.175 v1(-31.775,18.625)
NetU4_29: U4.29 U5.11 | length 14
  Top Layer w0.25: U5.11@-32.85,14.48 -32.85,15.7 -32.35,16.2 v1(-32.35,17.575)
  Top Layer w0.3: v1(-34.1,22.5) -34.1,24.2 -33.5,24.8 U4.29@-33.5,27.3
  Bottom Layer w0.3: v1(-34.1,22.5) -34.1,19.325 v1(-32.35,17.575)
NetU4_30: U4.30 U5.1 | length 21.6
  Top Layer w0.25: -39.25,13.45 -39.25,20.075 -34,25.325 U4.30@-34,27.3
  Top Layer w0.3: -39.25,13.45 -39.25,9.55 -38.7,9 U5.1@-38.7,8.1
P1.0: IC1.12
P1.1: IC1.13
P1.2: IC1.14
P1.3: IC1.15
P1.4: IC1.16
P1.5: IC1.17
P1.6: IC1.18
P1.7: IC1.19
P2.0: IC1.20 R43_U_MPPT1.1 R44_U_MPPT1.2 | length 9.4
  Top Layer w0.25: IC1.20@-23.058,-28.32 -23.058,-27.058 -22,-26 -22,-23.65 -21.4,-23.05 R44_U_MPPT1.2@-21.4,-21.197
  Top Layer w0.5: R44_U_MPPT1.2@-21.397,-21.2 R43_U_MPPT1.1@-19.8,-21.2
P2.1: IC1.21 R43_U_MPPT2.1 R44_U_MPPT2.2 | length 9.6
  Top Layer w0.25: v1(-25.175,-23.766) -25.175,-22.475 -25,-22.3 R44_U_MPPT2.2@-25,-21.097 ; IC1.21@-23.558,-28.32 v1(-23.558,-25.383)
  Top Layer w0.5: R43_U_MPPT2.1@-26.597,-21.097 R44_U_MPPT2.2@-25,-21.097
  Bottom Layer w0.25: v1(-25.175,-23.766) v1(-23.558,-25.383)
P2.2: IC1.22
P2.3: IC1.23 R47_U_MPPT1.1 U7_U_MPPT1.6 | length 111.1
  Top Layer w0.25: IC1.23@-24.558,-28.32 -24.558,-24.858 -22.9,-23.2 R47_U_MPPT1.1@-22.9,-21.2 -23.825,-20.275 -23.825,-17.575 -24.5,-16.9 -24.5,-0.875 -20.325,3.3 -9.1,3.3 -6.325,6.075 17.975,6.075 24.9,-0.85 v1(24.9,-3.275) ; v1(20.545,-22.905) 23.145,-22.905 24.9,-21.15 v1(24.9,-13.05)
  Bottom Layer w0.25: U7_U_MPPT1.6@18.72,-22.905 v1(20.545,-22.905) ; v1(24.9,-13.05) v1(24.9,-3.275)
P2.4: IC1.24 R47_U_MPPT2.1 U7_U_MPPT2.6 | length 150.8
  Top Layer w0.25: IC1.24@-25.058,-28.32 -25.058,-25.092 -28.2,-21.95 R47_U_MPPT2.1@-28.2,-21.1 -28.95,-21.1 -29.75,-20.3 -29.75,-15.575 -27.025,-12.85 -27.025,0.95 -21.65,6.325 -9.65,6.325 -5.375,10.6 39.1,10.6 45.3,4.4 45.3,-4.275 48.975,-7.95 54.35,-7.95 60.725,-14.325 60.725,-21.35 60.7,-21.35 v1(59.144,-22.906)
  Bottom Layer w0.25: U7_U_MPPT2.6@57.487,-22.906 v1(59.144,-22.906)
P2.5: IC1.25
P2.6: IC1.26
P3.0: IC1.28 R33.1 R34.2 U5.5 | length 53.3
  Top Layer w0.25: v1(-39.925,3.7) -39.925,4.925 -38.95,5.9 R33.1@-36.2,5.9 U5.5@-36.2,8 ; v1(-32.275,-1.5) -30.625,-3.15 -30.625,-20.061 -30.075,-20.611 -30.075,-22.375 -27.058,-25.392 IC1.28@-27.058,-28.32
  Bottom Layer w0.25: v1(-39.925,3.7) -41.725,1.9 -41.725,-1.325 -39.625,-3.425 -34.2,-3.425 v1(-32.275,-1.5)
P3.1: IC1.29 R6.1 R24.2 | length 36.6
  Top Layer w0.25: R24.2@-33.3,4.503 R6.1@-33.3,3 -34.125,3 -34.45,2.675 -34.45,-0.825 -31.075,-4.2 -31.075,-20.4 -30.525,-20.95 -30.525,-22.625 -27.558,-25.592 IC1.29@-27.558,-28.32
P3.2: IC1.30 R5.1 R26.2 | length 36.7
  Top Layer w0.25: v1(-31.925,-15.675) -31.925,-18.125 -31.525,-18.525 -31.525,-20.625 -30.975,-21.175 -30.975,-22.925 -28.058,-25.842 IC1.30@-28.058,-28.32 ; R26.2@-31.8,4.503 R5.1@-31.8,3 -30.75,3 -29.825,2.075 v1(-29.825,-13.575)
  Bottom Layer w0.3: v1(-31.925,-15.675) v1(-29.825,-13.575)
P3.6: IC1.34
P3.7: IC1.35
P4.0: IC1.36
P4.1: IC1.37
P4.2: IC1.38
P4.3: IC1.39
P4.4: IC1.40
P4.5: IC1.41
P4.6: IC1.42
P4.7: IC1.43 R10.1 U2.19 | length 7.9
  Top Layer w0.25: U2.19@-38.22,-37.55 -37.475,-37.55 -36.9,-36.975 -36.9,-36.575 -35.945,-35.62 -34.845,-35.62
  Top Layer w0.3: -34.845,-35.62 IC1.43@-31.358,-35.62
P5.1: IC1.45 U2.16 | length 8.1
  Top Layer w0.25: U2.16@-38.22,-39.5 -35.364,-39.5 -32.483,-36.62 IC1.45@-31.358,-36.62
P5.2: IC1.46 U2.17 | length 10.6
  Top Layer w0.25: U2.17@-38.22,-38.85 -36.025,-38.85 v1(-34.7,-37.525) ; IC1.46@-31.358,-37.12 v1(-29.87,-37.12)
  Bottom Layer w0.25: v1(-34.7,-37.525) -34.295,-37.12 v1(-29.87,-37.12)
P5.3: IC1.47 U2.14 | length 8.2
  Top Layer w0.25: U2.14@-38.22,-40.8 -35.875,-40.8 -32.695,-37.62 IC1.47@-31.358,-37.62
P5.4: IC1.48
P5.5: IC1.49
P5.6: IC1.50
P5.7: IC1.51
PACK+: C34_U_MPPT1.2 C34_U_MPPT2.2 C36_U_MPPT1.1 C36_U_MPPT2.1 C37_U_MPPT1.1 C37_U_MPPT2.1 C41_U_MPPT1.1 C41_U_MPPT2.1 L2_U_MPPT1.2 L2_U_MPPT2.2 Q1.1 Q1.2 Q1.3 R7.2 R8.2 R13.1 S1.2 U7_U_MPPT1.2 U7_U_MPPT1.10 U7_U_MPPT2.2 U7_U_MPPT2.10 | length 245
  Top Layer w0.25: R8.2@-46.4,40.103 -45.394,40.103 R7.2@-44.9,40.597 -44.9,42.375 -45.35,42.825 Q1.1@-46.23,42.825 ; Q1.1@-46.3,42.895 Q1.3@-46.3,45.435
  Top Layer w1: R13.1@-44.2,34.7 -44.2,36.525 v1(-43.175,37.55) ; v1(-41.75,38.975) -41.75,43.375 ; C37_U_MPPT2.1@-8.9,-5.9 -8.9,-14.475 v1(-0.375,-23) ; L2_U_MPPT2.2@34.375,-8.668 34.375,-20.35 v1(38.196,-24.171)
  Bottom Layer w0.5: v1@-0.35,-23.025 4.9,-23.025 5.6,-23.725 C34_U_MPPT1.2@5.6,-25.975 ; C36_U_MPPT1.1@5.6,-24.2 U7_U_MPPT1.10@8.055,-24.2
  Bottom Layer w1: v1(-43.175,37.55) v1(-41.75,38.975) ; U7_U_MPPT1.10@8.08,-24.175 9.75,-24.175 16.1,-17.825 U7_U_MPPT1.2@18.72,-17.825 ; v1(38.196,-24.171) C34_U_MPPT2.2@44.3,-24.171 ; C34_U_MPPT2.2@44.329,-24.2 44.353,-24.176 49.424,-24.176 55.774,-17.826 59.53,-17.826 C36_U_MPPT2.1@59.784,-17.572
  Bottom Layer w3: S1.2@-37.8,43.62 -34.63,43.62 -31.875,46.375 -31.875,53.525 -27.6,57.8 -5.95,57.8 -5.1,56.95
  Bottom Layer w5: -5.1,56.95 45,6.85 45,-4.25 43.45,-5.8 C37_U_MPPT1.1@29.2,-5.8
TCK: IC1.57 J3.7 | length 22.9
  Top Layer w0.25: IC1.57@-25.058,-40.42 -25.058,-43.033 -24.441,-43.65 -21.85,-43.65 -16.05,-49.45 -16.05,-56.13 J3.7@-14.68,-57.5
TDI: IC1.55 J3.5 | length 22.2
  Top Layer w0.25: IC1.55@-26.058,-40.42 -26.058,-43.306 -24.789,-44.575 -22.375,-44.575 -18.525,-48.425 -18.525,-56.195 J3.5@-17.22,-57.5
TDO: IC1.54 J3.4 | length 19.3
  Top Layer w0.25: IC1.54@-26.558,-40.42 -26.558,-43.442 -24.975,-45.025 -22.625,-45.025 -19.76,-47.89
  Top Layer w0.3: J3.4@-19.76,-54.96 -19.76,-53.635 -19.125,-53 -19.125,-48.525 -19.76,-47.89
TMS: IC1.56 J3.6 | length 19.5
  Top Layer w0.25: IC1.56@-25.558,-40.42 -25.558,-43.169 -24.627,-44.1 -22.075,-44.1 -17.22,-48.955 J3.6@-17.22,-54.96
VREF: C14.1 C15.1 IC1.7 | length 5
  Top Layer w0.25: v1(-20.87,-35.12) IC1.7@-19.258,-35.12
  Bottom Layer w0.25: C15.1@-22.55,-33.225 -22.15,-33.625 C14.1@-22.15,-35.125 -20.875,-35.125 v1(-20.87,-35.12)
XT1IN: IC1.8 Y2.1 | length 2.8
  Top Layer w0.25: IC1.8@-19.258,-34.62 -18.105,-34.62 -17.625,-35.1 Y2.1@-16.7,-35.1
XT1OUT: IC1.9 Y2.2 | length 4.7
  Top Layer w0.25: IC1.9@-19.258,-34.12 -15.98,-34.12 Y2.2@-15,-35.1
XT2IN: C17.1 IC1.53 Y3.1 | length 10.3
  Top Layer w0.25: IC1.53@-27.058,-40.42 -27.058,-43.817 -24.425,-46.45 Y3.1@-22.935,-46.45
  Bottom Layer w0.3: C17.1@-22.95,-48.15 Y3.1@-22.95,-46.465
XT2OUT: C16.1 IC1.52 Y3.2 | length 7.8
  Top Layer w0.25: Y3.2@-27.815,-46.45 -27.815,-45.075 -27.558,-44.818 IC1.52@-27.558,-40.42
  Bottom Layer w0.3: C16.1@-27.815,-48.115 Y3.2@-27.815,-46.45
pads on no net: H1.1 H2.1 H3.1 H4.1 H5.1 H6.1 J1.0 J2.0 J3.1 J3.9 J3.10 J5_U_MPPT1.0 J5_U_MPPT2.0 S1.0 S1.3 U1.5 U1.8 U2.4 U2.5 U2.6 U2.7 U2.11 U2.12 U2.15 U3.2 U3.3 U4.15 U4.18 U4.20 U4.21 U4.25 U4.27 U5.7 U5.9 U7_U_MPPT1.5 U7_U_MPPT2.5

## Polygon pours and split planes (outlines as drawn)
CANGND on Bottom Layer (solid, remove dead copper): -62.5,60.4 62.5,60.4 62.5,-60.4 -62.5,-60.4

## Keep-outs
Keep-Out Layer:
  the board outline again, w0.025

## Other copper
Top Layer:
  rectangle net CAN+12V: -60.15,-25.675 -54.975,-23.6
  rectangle net CANGND: -59.7,-20.075 -53.725,-17.35
  region net CANGND: -20.475,11.575 -23.4,11.575 -23.4,8.125 -20.475,8.125
  rectangle net NetB3_2: -23.275,12.575 -14.5,15.025
  rectangle net NetB1_2: -19.925,26.925 -9.675,50.65
  rectangle net NetB1_1: -28.45,54.025 -23.625,58.275
  rectangle net NetC21_1: -28.325,47.45 -23.65,53.65
  rectangle net NetC21_1: -28.325,47.45 -21.575,52.125
  rectangle net NetC21_1: -22.9,41.575 -21.15,51.6
  rectangle net NetC21_1: -25.625,41.575 -21.575,45.125
  rectangle net NetQ3_5: -31.875,35.975 -27.175,46.95
  rectangle net NetQ3_1: -41.475,46.2 -36.525,49.725
  rectangle net NetQ3_1: -41.475,46.2 -32.225,47.475
  rectangle net NetQ3_1: -34.9,37.275 -32.225,47.475
  rectangle net NetB2_2: 44.775,8.55 55.775,37.125
  rectangle net NetB1_1: -7.875,42.85 60.35,59.625
  rectangle net NetB1_1: -28.45,56 60.35,59.625
  rectangle net CAN+12V: -48.65,7.875 -43.225,19.225
  rectangle net CAN+12V: -60.225,19.225 -43.225,26.35
  rectangle net CAN+12V: -60.225,19.225 -53.425,47.375
  rectangle net CAN+12V: -60.225,42.375 -50.125,47.375
  rectangle net PACK+: -47.65,42.45 -36.525,45.9
  rectangle net CANGND: 15.325,-31.9 19.275,-27.85
  rectangle net NetC35_U_MPPT1_1: 3.325,-37.425 19.475,-32.525
  rectangle net NetC35_U_MPPT1_1: 3.325,-37.425 12,-25.725
  rectangle net NetC33_U_MPPT1_2: 12.9,-27.05 19.475,-16.85
  rectangle net NetC33_U_MPPT1_2: 0.725,-19.3 19.475,-16.85
  rectangle net NetC33_U_MPPT1_2: 0.725,-24.075 9.725,-16.85
  rectangle net PACK+: -20.65,-10.7 36.2,-4.275
  rectangle net CANGND: 54.075,-31.625 58.2,-28
  rectangle net NetC33_U_MPPT2_2: 51.55,-26.95 58,-18.125
  rectangle net NetC33_U_MPPT2_2: 39.65,-20.125 58,-16.9
  rectangle net NetC33_U_MPPT2_2: 39.625,-25.125 45.8,-18.975
  rectangle net NetC35_U_MPPT2_1: 41.95,-38.175 50.525,-25.9
  rectangle net NetC35_U_MPPT2_1: 41.95,-38.175 57.65,-32.775
  rectangle net CAN+12V: -55.925,-25.125 -54.875,-20.9
  rectangle net NetC7_2: -54.475,-23.275 -53.525,-21
  rectangle net NetD2_K: -53.275,-22.625 -49.975,-18.325
  rectangle net NetD2_K: -50.85,-29.25 -49.975,-18.325
  rectangle net NetD2_K: -54.3,-29.25 -49.975,-25.75
  rectangle net CANGND: -48.675,-22.65 -43.125,-18.3
  rectangle net 3V3: -49.7,-29.25 -43.325,-24.15
Bottom Layer:
  rectangle net NetC33_U_MPPT2_2: 43.55,-22.875 48,-20
  rectangle net NetC33_U_MPPT2_2: 45.6,-23.3 48,-20

## Silkscreen, mask and mechanical layers (free items; w line width, h text height)
Top Overlay:
  text "+" at 56.45,55.7 h3 r90
  text "TrackBat" at -60.175,22.925 h3
  text "DCAS, 2009" at -57.8,11.775 h1.5
  text "-" at -16.65,7.975 h3 r180
  text "MPPT 1" at 0.025,-44.625 h3 r90
  text "MPPT 2" at 33.2,-44.625 h3 r90
  text "-" at 41.375,-45.475 h3 r180
  text "-" at 27.025,-45.85 h3 r180
  text "+" at 41.375,-50.15 h3 r180
  text "+" at 27.025,-50.525 h3 r180
Bottom Overlay:
  text "-" at 15.4,-47.85 h1.5
  text "-" at 55.175,-48 h1.5
  text "+" at 15.575,-52.775 h1.5
  text "+" at 54,-53.475 h1.5
Mechanical 1:
  the board outline again, w0.025

## Text inside footprints (layer, text, board x,y; h text height)
ID1: Top Overlay "ID" at -47.623,-5.255 h1
J1: Top Overlay "131-040" at -31.274,-49.547 h1 r180
J2: Top Overlay "131-040" at -47.374,-49.547 h1 r180